# Altium PCB МПСУ-46342.21-004 Т5М.PcbDoc
Units mm, origin at the board's own origin, x right, y up, seen from the top; angles counter-clockwise.
Board outline 150 x 101.97 mm, 4 copper layers (Top Layer, RFGND, PWRandSignal, Bottom Layer), stack 1.292 mm thick; 65 components, 33 nets, 298 pads, 75 vias.
Unrouted connection lines stored in the file: 142.
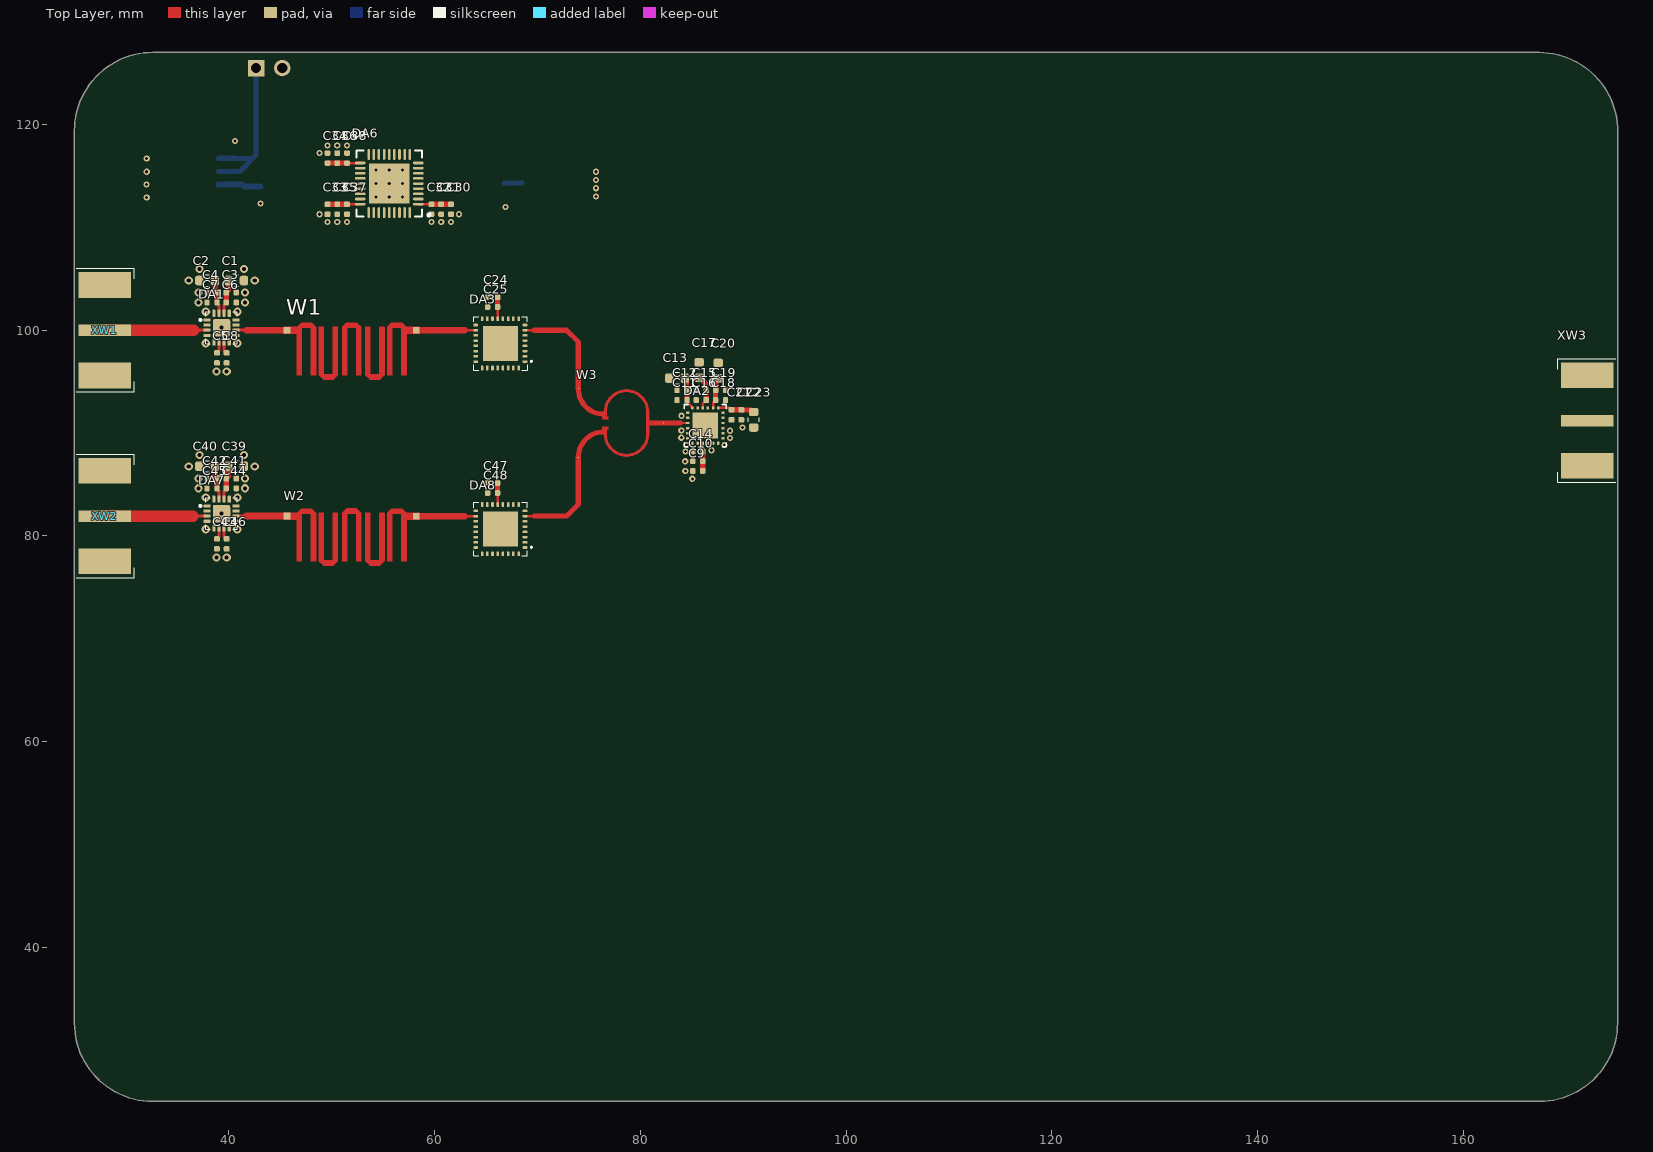
[diagram p0: Top Layer view]
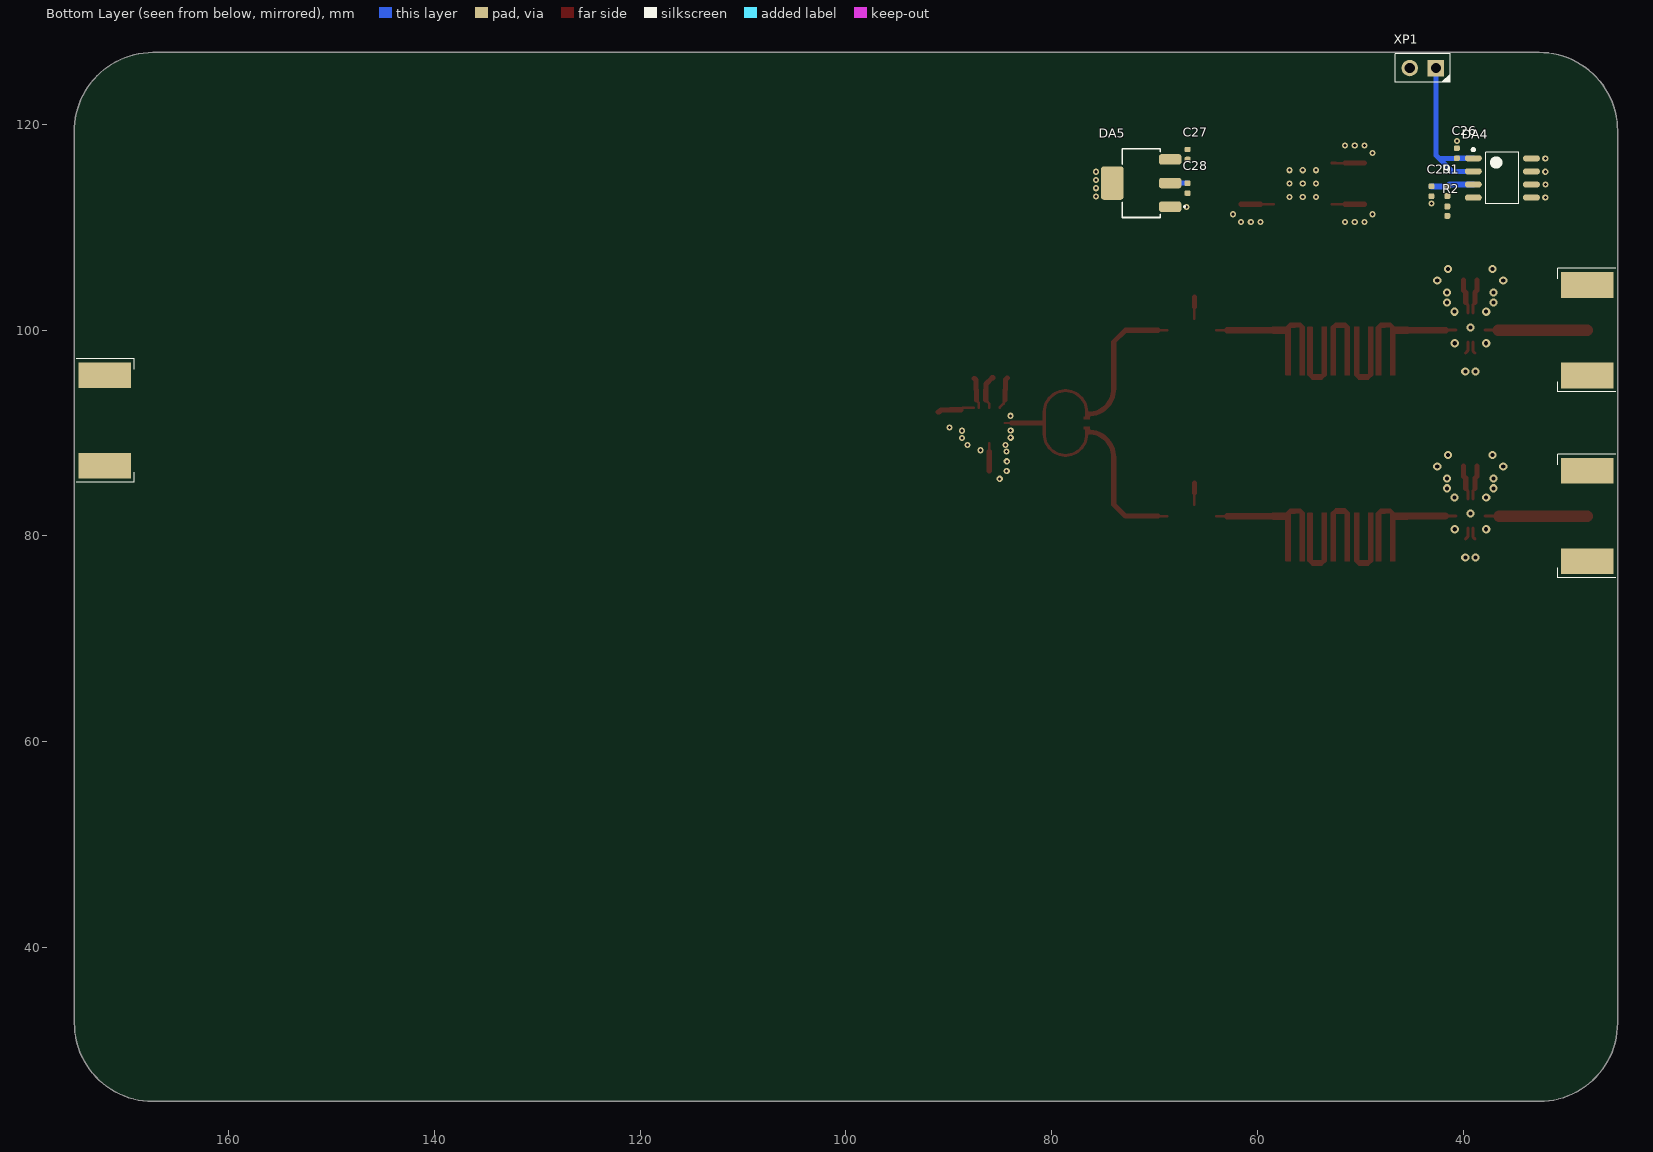
[diagram p1: Bottom Layer view, seen from below]

## Layer stack, top to bottom
Top Solder: solder mask 0.0102, Solder Resist, Dk 3.5
Top Layer: signal copper 0.018
RO4003C_12: core 0.508, RO4003C, Dk 3.55
RFGND: signal copper 0.018
RO4450F_23: prepreg 0.102, RO4450F, Dk 3.52
RO4450F_23_1: prepreg 0.102, RO4450F, Dk 3.52
PWRandSignal: signal copper 0.018
FR4_34: core 0.508, PP-006, Dk 4.6
Bottom Layer: signal copper 0.018
Bottom Solder: solder mask 0.0102, Solder Resist, Dk 3.5

## Board outline
25,32.663 25,119.37 24.998,119.368 cw(c32.63,119.368) 32.63,127 167.361,127 167.368,126.994 cw(c167.368,119.361) 174.999,119.234 174.999,32.663 cw(c167.367,32.663) 167.367,25.031 32.632,25.031 cw(c32.632,32.663)

## Design rules (kind name [scope] priority, off if disabled: settings)
AssemblyTestPointUsage [All] p1 off:
AssemblyTestpoint [All] p1 off: testpointundercomponent=TRUE minsize=1.016 maxsize=2.54 preferedsize=1.524 minholesize=0 maxholesize=1.016 preferedholesize=0.813 testpointgrid=0.025 usegrid=TRUE gridtolerance=0 allowsidetop=TRUE allowsidebottom=TRUE
BoardOutlineClearance [All] p1: gap=0.25 ignorepadtopadclearanceinfootprint=FALSE
Clearance [All] p1: gap=0.15 ignorepadtopadclearanceinfootprint=FALSE
ComponentClearance [All] p1: gap=0.2 collisioncheckmode=3 verticalgap=2540 showdistances=FALSE
FabricationTestPointUsage [All] p1 off: valid=0 allowmultiple=FALSE
FabricationTestpoint [All] p1 off: side=3 testpointundercomponent=TRUE minsize=1.016 maxsize=2.54 preferedsize=1.524 minholesize=0 maxholesize=1.016 preferedholesize=0.813 testpointgrid=0.025 allowsidetop=TRUE allowsidebottom=TRUE usegrid=TRUE gridtolerance=0
HoleSize [All] p1: absolutevalues=TRUE maxlimit=3.2 minlimit=0.4 maxpercent=80.000 minpercent=20.000
HoleToHoleClearance [All] p1: gap=0.3 allowstackedmicrovias=TRUE
MinimumSolderMaskSliver [All] p1: minsoldermaskwidth=0.12
PolygonConnect PolygonConnectMH [IsPad and IsFree and (Name Like 'MH*?')] p1: connectstyle=NoConnect reliefconductorwidth=0.254 reliefentries=4 polygonreliefangle="90 Angle" airgapwidth=0.4
PolygonConnect PolygonConnectGNDVia [IsVia vs InNet('GND')] p2: connectstyle=Direct reliefconductorwidth=0.254 reliefentries=4 polygonreliefangle="90 Angle" airgapwidth=0.254
PolygonConnect PolygonConnectGNDDirect [InComponentClass('GNDDirect') vs InNet('GND')] p3: connectstyle=Direct reliefconductorwidth=0.254 reliefentries=4 polygonreliefangle="90 Angle" airgapwidth=0.254
PolygonConnect [All] p4: connectstyle=Relief reliefconductorwidth=0.2 reliefentries=4 polygonreliefangle="90 Angle" airgapwidth=0.2
RoutingLayers RoutingLayersRF [InNetClass('RF')] p1: top layer_v5=TRUE mid layer 1_v5=FALSE mid layer 2_v5=FALSE bottom layer_v5=FALSE
RoutingLayers [All] p2: top layer_v5=TRUE mid layer 1_v5=TRUE mid layer 2_v5=TRUE bottom layer_v5=TRUE
RoutingVias [All] p1: holewidth=0.4 width=0.8 viastyle="Through Hole" minholewidth=0.4 minwidth=0.8 maxholewidth=3.2 maxwidth=4
SilkToSilkClearance [All] p1: silktosilkclearance=0.15
SilkToSolderMaskClearance [IsPad] p1: minsilkscreentomaskgap=0.15 clearancetoexposedcopper=TRUE
SolderMaskExpansion SolderMaskExpansionGNDVia [IsVia and InNet('GND')] p1: expansion=0.102 istentingtop=FALSE
SolderMaskExpansion [All] p2: expansion=0.075 istentingtop=FALSE
Width WidthRF [InNetClass('RF')] p1: maxlimit=1.1 minlimit=0.2 preferedwidth=0.254 toplayer_prefwidth=1.1 impedanceprofiledriven=TRUE impedanceprofileid={393F9141-3DCD-45E2-ACEF-11D70CD72339} impedanceprofilevalue=50.000000 minimp=50.000000 maximp=50.000000 favimp=50.000000
Width [All] p2: maxlimit=1.1 minlimit=0.15 preferedwidth=0.2
19 further rules are at their usual default settings.

## Classes and differential pairs
component class M4: C47 C48 DA8
component class M3: C39 C40 C41 C42 C43 C44 C45 C46 DA7
component class GNDDirect: XW1 XW2 XW3
net class RF: "LNA1 RF IN C1" "LNA1 RF IN C2" "LNA1 RF OUT C1" "LNA1 RF OUT C2" "LNA2 RF IN" "LNA2 RF OUT" "PS RF IN C1" "PS RF IN C2" "PS RF OUT C1" "PS RF OUT C2"
component class M7: C30 C31 C32 C33 C34 C35 C36 C37 C38 DA6
component class M6: C26 C27 C28 C29 DA4 DA5 R1 R2
component class M2: C24 C25 DA3
component class M5: C9 C10 C11 C12 C13 C14 C15 C16 C17 C18 C19 C20 C21 C22 C23 DA2
component class M1: C1 C2 C3 C4 C5 C6 C7 C8 DA1
component class "МПСУ-46342.21-004 Э3 Лист1": W1 W2 W3 XP1 XW1 XW2 XW3
component class RFCons: DA1 DA2 DA7

## Components (designator, comment, footprint, x,y, rotation, side; value= is the part's Value field where it differs from the comment)
C1 "4.7 uF" CAPC160X80X90L30N 40.725,104.825 r180 top
C2 "4.7 uF" CAPC160X80X90L30N 37.9,104.825 r0 top
C3 "10 pF" CAPC100X50X55L20N 40.25,103.65 r180 top value="0.01 nF"
C4 "10 pF" CAPC100X50X55L20N 38.375,103.65 r0 top value="0.01 nF"
C5 "100 pF" CAPC100X50X55L20N 38.85,97.3 r90 top
C6 "100 pF" CAPC100X50X55L20N 40.25,102.7 r180 top
C7 "100 pF" CAPC100X50X55L20N 38.375,102.7 r0 top
C8 "100 pF" CAPC100X50X55L20N 39.8,97.3 r90 top
C9 "2.2 uF" CAPC100X50X55L20N 85.59,86.318 r0 top
C10 "1000 pF" CAPC100X50X55L20N 85.59,87.267 r0 top
C11 "100 pF" CAPC100X50X55L20N 84.059,93.196 r0 top
C12 "1000 pF" CAPC100X50X55L20N 84.058,94.162 r0 top
C13 "2.2 uF" CAPC160X80X90L30N 83.575,95.341 r0 top
C14 "100 pF" CAPC100X50X55L20N 85.585,88.212 r0 top
C15 "100 pF" CAPC100X50X55L20N 85.926,94.169 r0 top
C16 "1000 pF" CAPC100X50X55L20N 85.925,93.201 r0 top
C17 "2.2 uF" CAPC160X80X90L30N 85.725,96.125 r270 top
C18 "100 pF" CAPC100X50X55L20N 87.802,93.199 r180 top
C19 "1000 pF" CAPC100X50X55L20N 87.811,94.172 r180 top
C20 "2.2 uF" CAPC160X80X90L30N 87.571,96.073 r270 top
C21 "100 pF" CAPC100X50X55L20N 88.87,91.774 r90 top
C22 "1000 pF" CAPC100X50X55L20N 89.822,91.77 r90 top
C23 "2.2 uF" CAPC160X80X90L30N 91.027,91.29 r90 top
C24 "1000 pF" CAPC100X50X55L20N 65.65,103.2 r0 top
C25 "100 pF" CAPC100X50X55L20N 65.65,102.25 r0 top
C26 "10 uF" CAPC100X50X55L20N 40.625,117.199 r270 bottom
C27 "10 uF" CAPC100X50X55L20N 66.8,117.075 r270 bottom
C28 "10 uF" CAPC100X50X55L20N 66.8,113.8 r90 bottom
C29 "10 uF" CAPC100X50X55L20N 43.1,113.5 r90 bottom
C30 "4.7 uF" CAPC100X50X55L20N 61.6,111.75 r90 top
C31 "10 pF" CAPC100X50X55L20N 60.65,111.75 r90 top
C32 "100 pF" CAPC100X50X55L20N 59.7,111.75 r90 top
C33 "4.7 uF" CAPC100X50X55L20N 49.6,111.75 r90 top
C34 "4.7 uF" CAPC100X50X55L20N 49.6,116.725 r270 top
C35 "10 pF" CAPC100X50X55L20N 50.55,111.75 r90 top
C36 "10 pF" CAPC100X50X55L20N 50.55,116.725 r270 top
C37 "100 pF" CAPC100X50X55L20N 51.5,111.75 r90 top
C38 "100 pF" CAPC100X50X55L20N 51.5,116.725 r270 top
C39 "4.7 uF" CAPC160X80X90L30N 40.725,86.775 r180 top
C40 "4.7 uF" CAPC160X80X90L30N 37.9,86.775 r0 top
C41 "10 pF" CAPC100X50X55L20N 40.25,85.575 r180 top value="0.01 nF"
C42 "10 pF" CAPC100X50X55L20N 38.375,85.575 r0 top value="0.01 nF"
C43 "100 pF" CAPC100X50X55L20N 38.85,79.225 r90 top
C44 "100 pF" CAPC100X50X55L20N 40.25,84.625 r180 top
C45 "100 pF" CAPC100X50X55L20N 38.375,84.625 r0 top
C46 "100 pF" CAPC100X50X55L20N 39.8,79.225 r90 top
C47 "1000 pF" CAPC100X50X55L20N 65.65,85.14 r0 top
C48 "100 pF" CAPC100X50X55L20N 65.65,84.174 r0 top
DA1 "HMC902LP3" QFN17P50_300X300X90L40X25T170N 39.3,100.25 r270 top
DA2 "HMC633LC4" PQFN25P50_390X390X100L32X30T250N 86.325,90.725 r270 top
DA3 "TGP2105-SM" QFN33P50_500X500X80L46X25T340N 66.4,98.725 r90 top
DA4 "MIC39102" SOIC127P600X160-8N 36.2,114.794 r180 bottom
DA5 "NCP1117LPST50T3G" SOT223-4P230_700X180L92X74N 71.3,114.3 r90 bottom
DA6 "" QFN50P600X600X90_HS-37N 55.6,114.25 r180 top
DA7 "HMC902LP3" QFN17P50_300X300X90L40X25T170N 39.3,82.175 r270 top
DA8 "TGP2105-SM" QFN33P50_500X500X80L46X25T340N 66.4,80.65 r90 top
R1 "330 k" RESC100X50X40L25N 41.55,113.5 r90 bottom
R2 "1 M" RESC100X50X40L25N 41.553,111.569 r90 bottom
W1 "Filter" Filter 52,97.94 r0 top
W2 "Filter" Filter 52,79.865 r0 top net-tie
W3 "Wilkinson Coupler" CouplerWilk 82.253,90.975 r180 top net-tie
XP1 "PLD-2 2x1" HDRV2W64P254_1X2_254X508H884 42.66,125.475 r90 bottom
XW1 "MOLEX 73251-1153" "MOLEX 73251-1153 - 1.1pin" 25,100 r0 top
XW2 "MOLEX 73251-1153" "MOLEX 73251-1153 - 1.1pin" 25,81.925 r0 top
XW3 "MOLEX 73251-1153" "MOLEX 73251-1153 - 1.1pin" 175,91.208 r180 top

## Footprints (in the part's own frame and the unit in brackets; to place one, negate y for a bottom-side part, rotate by r counter-clockwise, add the part's x,y. Pads: shape width x height; smd on the part's side, far side on the other; paste and mask are expansions set on the pad)
CAPC100X50X55L20N [mm] "Capacitor, Chip; 1.00 mm L X 0.50 mm W X 0.55 mm H body"
  rrect49% 0.53x0.58 smd: 1(-0.485,0) 2(0.485,0)
  body extent -0.5,-0.25 0.5,0.25, height 0.55
CAPC160X80X90L30N [mm] "Capacitor, Chip; 1.60 mm L X 0.80 mm W X 0.90 mm H body"
  rrect51% 0.82x0.93 smd: 1(-0.755,0) 2(0.755,0)
  silkscreen extent -0.2,-0.55 0.2,0.55, body extent -0.8,-0.4 0.8,0.4, height 0.9
CouplerWilk [mm] "Wilkinson Coupler diel 7.2GHz, RO4003, h=0.2mm"
  round 0.1 smd paste-0.1 mask-0.1: 1(0,0) 2(8.278,3.35) 3(8.278,-3.35)
  Top Layer region: 8.053,3.35 8.053,3.425 8.503,3.425 8.503,3.35
  Top Layer region: 8.053,-3.425 8.053,-3.35 8.503,-3.35 8.503,-3.425
  Top Layer region: 1.401,-1.074 1.401,-0.226 -0.1,-0.226 -0.1,0.226 1.401,0.226 1.401,1.074 1.618,2.024 2.226,2.786 3.103,3.209 4.078,3.209 4.956,2.786 5.563,2.024 5.78,1.074 5.78,1.074 6.917,1.38 7.749,2.213 8.053,3.35 8.053,3.35 8.503,3.35 8.296,2.308 7.705,1.425 6.822,0.835 5.78,0.627 5.78,0.627 5.78,0.625 5.966,0.625 5.966,0.376 5.341,0.376 5.341,0.625 5.529,0.625 5.529,1.074 5.336,1.916 4.798,2.592 4.02,2.966 3.156,2.966 2.378,2.592 1.84,1.916 1.648,1.074 1.648,1.074 1.65,1.074 1.65,-1.074 1.842,-1.916 2.381,-2.592 3.159,-2.966 4.022,-2.966 4.801,-2.592 5.339,-1.916 5.531,-1.074 5.531,-1.074 5.529,-1.074 5.529,-0.625 5.341,-0.625 5.341,-0.376 5.966,-0.376 5.966,-0.625 5.78,-0.625 7.142,-0.991 8.138,-1.988 8.503,-3.35 8.503,-3.35 8.053,-3.35 7.88,-2.48 7.388,-1.743 6.65,-1.25 5.78,-1.077 5.78,-1.077 5.78,-1.074 5.563,-2.024 4.956,-2.786 4.078,-3.209 3.103,-3.209 2.226,-2.786 1.618,-2.024 1.401,-1.074
Filter [mm] "Bandpass filter, Fc 8.9 GHz, BW 150 MHz"
  rect 0.657x0.657 smd paste-0.6 mask-0.6: 1(-6.334,2.059) 2(6.23,2.055)
  Top Layer region: 3.459,-2.343 3.86,-2.343 3.879,-2.339 3.896,-2.328 3.906,-2.312 3.91,-2.293 3.91,-2.293 3.91,2.283 4.336,2.283 4.34,2.283 4.344,2.282 4.344,2.282 4.775,2.282 4.775,-2.284 4.779,-2.304 4.79,-2.32 4.806,-2.331 4.826,-2.335 4.826,-2.335 5.231,-2.335 5.25,-2.331 5.266,-2.32 5.277,-2.304 5.281,-2.284 5.281,-2.284 5.281,1.727 6.508,1.727 6.527,1.73 6.544,1.741 6.554,1.758 6.558,1.777 6.558,1.777 6.558,2.333 6.554,2.352 6.544,2.368 6.527,2.379 6.508,2.383 6.508,2.383 5.251,2.383 4.862,2.773 4.845,2.784 4.826,2.788 4.826,2.788 4.344,2.788 4.34,2.788 4.336,2.787 4.336,2.787 3.86,2.787 3.836,2.782 3.818,2.765 3.818,2.765 3.424,2.371 3.412,2.354 3.408,2.335 3.408,2.335 3.408,-2.293 3.412,-2.312 3.423,-2.328 3.44,-2.339 3.459,-2.343
  Top Layer region: 1.292,-2.327 1.695,-2.731 1.712,-2.742 1.731,-2.746 1.731,-2.746 2.697,-2.746 2.721,-2.74 2.739,-2.724 2.739,-2.724 3.134,-2.328 3.145,-2.312 3.149,-2.293 3.149,-2.293 3.149,2.335 3.145,2.354 3.134,2.37 3.118,2.381 3.099,2.385 3.099,2.385 2.697,2.385 2.678,2.381 2.662,2.37 2.651,2.354 2.647,2.335 2.647,2.335 2.647,-2.241 1.781,-2.241 1.781,2.348 1.777,2.367 1.766,2.383 1.75,2.394 1.73,2.398 1.73,2.398 1.329,2.398 1.309,2.394 1.293,2.383 1.282,2.367 1.278,2.348 1.278,2.348 1.278,-2.282 1.28,-2.307 1.292,-2.328
  Top Layer region: -0.987,-2.291 -0.983,-2.31 -0.972,-2.326 -0.956,-2.337 -0.937,-2.341 -0.937,-2.341 -0.535,-2.341 -0.516,-2.337 -0.499,-2.326 -0.489,-2.31 -0.485,-2.291 -0.485,-2.291 -0.485,2.297 0.382,2.297 0.382,-2.292 0.385,-2.311 0.396,-2.327 0.413,-2.338 0.432,-2.342 0.432,-2.342 0.834,-2.342 0.853,-2.338 0.869,-2.327 0.88,-2.311 0.884,-2.292 0.884,-2.292 0.884,2.338 0.885,2.343 0.885,2.348 0.885,2.348 0.881,2.367 0.87,2.383 0.87,2.383 0.467,2.787 0.45,2.798 0.431,2.802 0.431,2.802 -0.535,2.802 -0.558,2.796 -0.576,2.781 -0.576,2.781 -0.972,2.384 -0.983,2.368 -0.987,2.348 -0.987,2.348
  Top Layer region: -2.835,-2.729 -3.239,-2.325 -3.252,-2.304 -3.252,-2.279 -3.252,-2.279 -3.252,2.338 -3.248,2.357 -3.237,2.373 -3.221,2.384 -3.202,2.388 -3.202,2.388 -2.801,2.388 -2.782,2.384 -2.765,2.373 -2.754,2.357 -2.75,2.338 -2.75,2.338 -2.75,-2.239 -1.884,-2.239 -1.884,2.349 -1.88,2.368 -1.869,2.384 -1.853,2.395 -1.833,2.399 -1.833,2.399 -1.432,2.399 -1.412,2.395 -1.396,2.384 -1.385,2.368 -1.381,2.349 -1.381,2.349 -1.381,-2.291 -1.385,-2.31 -1.396,-2.327 -1.396,-2.327 -1.792,-2.723 -1.81,-2.738 -1.833,-2.744 -1.833,-2.744 -2.8,-2.744 -2.819,-2.74 -2.835,-2.729
  Top Layer region: -6.612,1.731 -5.385,1.731 -5.385,-2.28 -5.381,-2.299 -5.37,-2.316 -5.354,-2.326 -5.335,-2.33 -5.335,-2.33 -4.93,-2.33 -4.91,-2.326 -4.894,-2.316 -4.883,-2.299 -4.879,-2.28 -4.879,-2.28 -4.879,2.287 -4.448,2.287 -4.444,2.287 -4.44,2.287 -4.44,2.287 -4.014,2.287 -4.014,-2.29 -4.01,-2.309 -3.999,-2.325 -3.983,-2.336 -3.963,-2.34 -3.963,-2.34 -3.562,-2.34 -3.543,-2.336 -3.527,-2.325 -3.516,-2.309 -3.512,-2.29 -3.512,-2.29 -3.512,2.327 -3.511,2.332 -3.511,2.338 -3.511,2.338 -3.514,2.357 -3.526,2.374 -3.526,2.374 -3.929,2.777 -3.945,2.788 -3.965,2.792 -3.965,2.792 -3.965,2.792 -3.965,2.792 -3.965,2.792 -4.44,2.792 -4.444,2.792 -4.448,2.792 -4.448,2.792 -4.929,2.792 -4.949,2.789 -4.966,2.777 -4.966,2.777 -5.355,2.388 -6.612,2.388 -6.631,2.384 -6.648,2.373 -6.658,2.356 -6.662,2.337 -6.662,2.337 -6.662,1.781 -6.658,1.762 -6.648,1.746 -6.631,1.735 -6.612,1.731
HDRV2W64P254_1X2_254X508H884 [mm] "Header, Vertical, 2.54 mm pitch; 0.64 mm lead width, 2 pins, 2 rows, 1 pin per row, 2.54 mm L X 5.08 mm W X 8.84 mm H body"
  rect 1.6x1.6 hole 1 paste-1.6: 1(0,0)
  round 1.6 hole 1 paste-1.6: 2(0,2.54)
  silkscreen extent -1.4,-1.4 1.4,3.95, body extent -1.27,-1.27 1.27,3.81, height 8.84
"MOLEX 73251-1153 - 1.1pin" [mm] "MOLEX 50 Ohms, SMA Jack Receptacle, Edge Mount, .25µm Gold (Au) Plating"
  rect 5.1x1.1 smd: 1(2.95,0)
  rect 5.1x2.5 smd: 2(2.95,-4.4) 2(2.95,4.4)
  rect 5.1x2.5 smd far side: 2(2.95,-4.4) 2(2.95,4.4)
  silkscreen extent 0.2,-6 5.8,6, body extent -9.5,-4.76 4.77,4.76, height 4.36
PQFN25P50_390X390X100L32X30T250N [mm] "Pullback Quad Flat No-Lead (PQFN with Tab), 0.50 mm pitch; square, 6 pin X 6 pin, 3.90 mm L X 3.90 mm W X 1.00 mm H body"
  rrect51% 0.24x0.32 smd: 1(-1.25,-1.715) 2(-0.75,-1.715) 3(-0.25,-1.715) 4(0.25,-1.715) 5(0.75,-1.715) 6(1.25,-1.715) 13(1.25,1.715) 14(0.75,1.715) 15(0.25,1.715) 16(-0.25,1.715) 17(-0.75,1.715) 18(-1.25,1.715)
  rrect51% 0.32x0.24 smd: 7(1.715,-1.25) 8(1.715,-0.75) 9(1.715,-0.25) 10(1.715,0.25) 11(1.715,0.75) 12(1.715,1.25) 19(-1.715,1.25) 20(-1.715,0.75) 21(-1.715,0.25) 22(-1.715,-0.25) 23(-1.715,-0.75) 24(-1.715,-1.25)
  rect 2.5x2.5 smd: 25(0,0)
  silkscreen extent -2.05,-2.05 2.05,2.05, body extent -1.95,-1.95 1.95,1.95, height 1
QFN17P50_300X300X90L40X25T170N [mm] "Quad Flat No-Lead (QFN with Tab), 0.50 mm pitch; square, 4 pin X 4 pin, 3.00 mm L X 3.00 mm W X 0.90 mm H body"
  rrect51% 0.3x0.71 smd: 1(-0.75,-1.405) 2(-0.25,-1.405) 3(0.25,-1.405) 4(0.75,-1.405) 9(0.75,1.405) 10(0.25,1.405) 11(-0.25,1.405) 12(-0.75,1.405)
  rrect51% 0.71x0.3 smd: 5(1.405,-0.75) 6(1.405,-0.25) 7(1.405,0.25) 8(1.405,0.75) 13(-1.405,0.75) 14(-1.405,0.25) 15(-1.405,-0.25) 16(-1.405,-0.75)
  rrect24% 1.7x1.7 smd paste-1.7: 17(0,0)
  silkscreen extent -1.55,-2.16 1.55,1.55, body extent -1.55,-1.55 1.55,1.55, height 0.9
QFN33P50_500X500X80L46X25T340N [mm] "Quad Flat No-Lead (QFN with Tab), 0.50 mm pitch; square, 8 pin X 8 pin, 5.00 mm L X 5.00 mm W X 0.80 mm H body"
  rrect54% 0.25x0.46 smd: 1(-1.778,-2.395) 2(-1.27,-2.395) 3(-0.762,-2.395) 4(-0.254,-2.395) 5(0.254,-2.395) 6(0.762,-2.395) 7(1.27,-2.395) 8(1.778,-2.395) 17(1.778,2.395) 18(1.27,2.395) 19(0.762,2.395) 20(0.254,2.395) 21(-0.254,2.395) 22(-0.762,2.395) 23(-1.27,2.395) 24(-1.778,2.395)
  rrect54% 0.46x0.25 smd: 9(2.395,-1.778) 10(2.395,-1.27) 11(2.395,-0.762) 12(2.395,-0.254) 13(2.395,0.254) 14(2.395,0.762) 15(2.395,1.27) 16(2.395,1.778) 25(-2.395,1.778) 26(-2.395,1.27) 27(-2.395,0.762) 28(-2.395,0.254) 29(-2.395,-0.254) 30(-2.395,-0.762) 31(-2.395,-1.27) 32(-2.395,-1.778)
  rect 3.4x3.4 smd: 33(0,0)
  silkscreen extent -2.6,-3.09 2.6,2.6, body extent -2.55,-2.55 2.55,2.55, height 0.8
QFN50P600X600X90_HS-37N [mm] "QFN, 36-Leads, Body 6,00x6,00mm, Pitch 0,50mm, Thermal Pad 3,90x3,90mm, IPC Medium Density"
  oval 1.05x0.25 smd: 1(-2.825,2) 2(-2.825,1.5) 3(-2.825,1) 4(-2.825,0.5) 5(-2.825,0) 6(-2.825,-0.5) 7(-2.825,-1) 8(-2.825,-1.5) 9(-2.825,-2) 19(2.825,-2) 20(2.825,-1.5) 21(2.825,-1) 22(2.825,-0.5) 23(2.825,0) 24(2.825,0.5) 25(2.825,1) 26(2.825,1.5) 27(2.825,2)
  oval 0.25x1.05 smd: 10(-2,-2.825) 11(-1.5,-2.825) 12(-1,-2.825) 13(-0.5,-2.825) 14(0,-2.825) 15(0.5,-2.825) 16(1,-2.825) 17(1.5,-2.825) 18(2,-2.825) 28(2,2.825) 29(1.5,2.825) 30(1,2.825) 31(0.5,2.825) 32(0,2.825) 33(-0.5,2.825) 34(-1,2.825) 35(-1.5,2.825) 36(-2,2.825)
  rect 3.9x3.9 smd: 37(0,0)
  silkscreen extent -3.98,-3.2 3.2,3.2, body extent -3.05,-3.05 3.05,3.05, height 0.9
RESC100X50X40L25N [mm] "Resistor, Chip; 1.00 mm L X 0.50 mm W X 0.40 mm H body"
  rrect52% 0.58x0.58 smd: 1(-0.46,0) 2(0.46,0)
  body extent -0.5,-0.25 0.5,0.25, height 0.4
SOIC127P600X160-8N [mm] "SOIC, 8-Leads, Body 4.90x3.90mm, Pitch 1.27mm, IPC Medium Density"
  oval 1.65x0.6 smd: 1(-2.825,1.905) 2(-2.825,0.635) 3(-2.825,-0.635) 4(-2.825,-1.905) 5(2.825,-1.905) 6(2.825,-0.635) 7(2.825,0.635) 8(2.825,1.905)
  silkscreen extent -2.95,-2.5 1.6,2.88, body extent -3,-2.5 3,2.5, height 1.6
SOT223-4P230_700X180L92X74N [mm] "Small Outline Transistor (SOT223), 2.30 mm pitch; 4 pin, 6.50 mm L X 3.50 mm W X 1.80 mm H body"
  rrect49% 1.02x2.18 smd: 1(-2.3,-2.815) 2(0,-2.815) 3(2.3,-2.815)
  rrect23% 3.25x2.18 smd: 4(0,2.815)
  silkscreen extent -3.35,-4.28 3.35,1.85, body extent -3.25,-3.5 3.25,3.5, height 1.8

## Part data
C1 C13 C17 C20 C23 C39: library part Capacitor, "Capacitor, generic", Package=0603, Tolerance="5 %", VDC="20 V"
C2 C3 C4 C5 C6 C7 C8 C9 C10 C11 C12 C14 C15 C16 C18 C19 C21 C22 C24 C25 C26 C27 C28 C29 C30 C31 C32 C33 C34 C35 C36 C37 C38 C40 C41 C42 C43 C44 C45 C46 C47 C48: library part Capacitor, "Capacitor, generic", Package=0402, Tolerance="5 %", VDC="20 V"
DA1 DA7: "GaAs, pHEMT, MMIC, Low Noise Amplifier, 5 GHz to 11 GHz", Manufacturer="Analog Devices", ClassName=RFCons, ComponentLink1Description="Component page", ComponentLink1URL=https://www.analog.com/en/products/hmc902lp3e.html, PartNumber=HMC902LP3
DA2: "GaAs, pHEMT MMIC DRIVERAMPLIFIER, 5.5 - 17 GHz", Manufacturer="Analog Devices", ClassName=RFCons, ComponentLink1Description="Component page", ComponentLink1URL=https://www.analog.com/en/products/hmc633lc4.html, PartNumber=HMC633LC4
DA3 DA8: library part "TGP2105-SM 1", "6 - 18 GHz 6-Bit Digital Phase Shifter (+Vc)", Manufacturer=Qorvo, ComponentLink1Description="Component Page", ComponentLink1URL=https://www.qorvo.com/products/p/TGP2105-SM, PartNumber=TGP2105-SM
DA4: "1A Low-Voltage Low-Dropout Regulator, Adj", Manufacturer=Microchip, PartNumber=MIC39102
DA5: library part NCP1117LP, "1.0 A Low-Dropout Positive / Fixed and Adjustable / Voltage Regulators", Manufacturer="On Semiconductor", PartNumber=NCP1117LPST50T3G
DA6: library part GD32VF103Tx
R1: library part Resistor, "Resistor, generic", Package=0402
R2: library part Resistor, "Resistor, generic", Package=0402, Power="20 V", Tolerance="5 %"
W3: library part CouplerWilk, "Wilkinson Coupler diel 7.2GHz, RO4003, h=0.2mm"
XP1: library part PLD-2, "Header, Vertical, Non-shrouded, 2.54 mm pitch 2x1", Net1="+12 V", Net2=GND, PartNumber="PLD-2 2x1"
XW1 XW2 XW3: "MOLEX 73251-1153 (SMA EDGE)", Manufacturer=Molex, ClassName=GNDDirect, PartNumber="MOLEX 73251-1153"

## Via types
v1: diameter 0.6, hole 0.3, Top Layer to Bottom Layer, tented both sides, 45 vias
v2: diameter 0.8, hole 0.4, Top Layer to Bottom Layer, tented both sides, 30 vias

## Nets (pads, with @x,y where several pads share a name; then routed paths per layer and width w, separated by ;. In a path a pad name is that pad's centre, name@x,y a point inside that pad or via, vN(x,y) a via of type N, cw(c..) or ccw(c..) an arc to the next point about the centre after c; other vN are vias at no path point)
"12 V": C26.2 C27.2 DA4.1 DA4.2 DA5.3 XP1.1 | length 16.1
  Bottom Layer w0.5: DA4.2 41.097,115.429 42.367,116.699 ; DA4.1 39.032,116.707 40.617,116.707 C26.2 40.64,116.699 42.367,116.699 ; XP1.1 42.66,116.992 42.367,116.699
+3.5V: C1.2 C2.2 C3.2 C4.2 C6.2 C7.2 C28.2 C30.2 C31.2 C32.2 C33.2 C34.2 C35.2 C36.2 C37.2 C38.2 C39.2 C40.2 C41.2 C42.2 C44.2 C45.2 DA1.14 DA1.15 DA5.2 DA6.1 DA6.19 DA6.27 DA7.14 DA7.15 | length 24.7
  Top Layer w0.25: C33.2 C33.2@49.615,112.25 ; C37.2 51.515,112.25 DA6.27 ; C38.2 52.365,116.24 52.375,116.25 DA6.19 ; DA6.1 59.685,112.25 C32.2
  Top Layer w0.3: C45.2 38.86,84.6 39.05,84.41 DA7.15 ; C7.2 38.86,102.675 39.05,102.485 DA1.15 ; DA7.14 39.55,84.385 39.765,84.6 C44.2 ; DA1.14 39.55,102.46 39.765,102.675 C6.2
  Top Layer w0.5: C40.2 38.655,85.805 38.86,85.6 C42.2 C45.2 ; C2.2@38.655,104.85 38.655,103.88 38.86,103.675 C4.2 C7.2 ; C44.2 39.765,85.6 39.97,85.805 C39.2 ; C6.2 39.765,103.675 39.97,103.88 C1.2@39.97,104.85 ; C33.2 C35.2 C37.2 ; C34.2 C36.2 C38.2 ; C32.2 C31.2 C30.2
  Bottom Layer w0.5: C28.2 66.807,114.293 68.477,114.293 DA5.2
+5V: C11.2 C12.2 C13.2 C15.2 C16.2 C17.2 C18.2 C19.2 C20.2 C21.2 C22.2 C23.2 C24.2 C25.2 C29.2 C47.2 C48.2 DA2.19 DA2.20 DA2.22 DA2.24 DA3.13 DA4.3 DA8.13 R1.2 | length 21.7
  Top Layer w0.25: C48.2 66.146,84.163 DA8.13 ; C25.2 66.146,102.239 DA3.13 ; C11.2 84.681,93.059 84.681,92.864 85.075,92.47 DA2.24 ; DA2.22 86.075,92.866 86.248,93.039 86.27,93.039 86.41,93.178 C16.2 ; DA2.20 87.08,92.445 87.08,92.934 87.317,93.172 C18.2 ; DA2.19 88.661,92.44 C21.2@88.842,92.259
  Top Layer w0.5: C48.2 C47.2 ; C25.2 C24.2 ; C13.2 84.49,95.181 84.49,94.239 84.543,94.187 C12.2 C11.2 ; C17.2 85.78,95.37 86.396,94.754 86.396,94.184 C15.2 C16.2 ; C18.2 87.322,93.204 87.322,94.168 C19.2 87.326,94.197 87.356,94.227 87.356,95.158 87.516,95.318 C20.2 ; C21.2@88.842,92.259 88.844,92.257 89.82,92.257 C22.2 89.837,92.24 90.777,92.24 90.972,92.045 C23.2
  Bottom Layer w0.58: DA4.3 41.351,114.159 R1.2 43.075,113.96 C29.2
"+5V 5deg PS1": DA3.28 DA6.8
"+5V 5deg PS2": DA6.14 DA8.28
"+5V 11deg PS1": DA3.30 DA6.9
"+5V 11deg PS2": DA6.20 DA8.30
"+5V 22deg PS1": DA3.10 DA6.13
"+5V 22deg PS2": DA6.21 DA8.10
"+5V 45deg PS1": DA3.11 DA6.10
"+5V 45deg PS2": DA6.22 DA8.11
"+5V 90deg PS1": DA3.15 DA6.11
"+5V 90deg PS2": DA6.23 DA8.15
"+5V 180deg PS1": DA3.12 DA6.12
"+5V 180deg PS2": DA6.24 DA8.12
GND: C1.1 C2.1 C3.1 C4.1 C5.1 C6.1 C7.1 C8.1 C9.1 C10.1 C11.1 C12.1 C13.1 C14.1 C15.1 C16.1 C17.1 C18.1 C19.1 C20.1 C21.1 C22.1 C23.1 C24.1 C25.1 C26.1 C27.1 C28.1 C29.1 C30.1 C31.1 C32.1 C33.1 C34.1 C35.1 C36.1 C37.1 C38.1 C39.1 C40.1 C41.1 C42.1 C43.1 C44.1 C45.1 C46.1 C47.1 C48.1 DA1.1 DA1.2 DA1.4 DA1.5 DA1.8 DA1.9 DA1.11 DA1.12 DA1.13 DA1.16 DA1.17 DA2.1 DA2.2 DA2.4 DA2.5 DA2.6 DA2.7 DA2.8 DA2.10 DA2.11 DA2.12 DA2.13 DA2.14 DA2.15 DA2.17 DA2.18 DA2.25 DA3.1 DA3.2 DA3.3 DA3.4 DA3.5 DA3.6 DA3.8 DA3.9 DA3.14 DA3.16 DA3.17 DA3.19 DA3.20 DA3.21 DA3.22 DA3.23 DA3.24 DA3.25 DA3.26 DA3.27 DA3.29 DA3.31 DA3.32 DA3.33 DA4.5 DA4.6 DA4.7 DA4.8 DA5.1 DA5.4 DA7.1 DA7.2 DA7.4 DA7.5 DA7.8 DA7.9 DA7.11 DA7.12 DA7.13 DA7.16 DA7.17 DA8.1 DA8.2 DA8.3 DA8.4 DA8.5 DA8.6 DA8.8 DA8.9 DA8.14 DA8.16 DA8.17 DA8.19 DA8.20 DA8.21 DA8.22 DA8.23 DA8.24 DA8.25 DA8.26 DA8.27 DA8.29 DA8.31 DA8.32 DA8.33 R2.1 XP1.2 XW1.2 XW2.2 XW3.2
  other v1: 59.7,110.515 60.65,110.515 61.6,110.515 62.375,111.265 32,114.15
  other v2: 39.3,82.175 39.3,100.25
"LNA1 RF IN C1": DA1.3 XW1.1 | length 9.9
  Top Layer w0.3: 36.6,100 DA1.3
  Top Layer w1.1: XW1.1 36.6,100
"LNA1 RF IN C2": DA7.3 XW2.1 | length 9.9
  Top Layer w0.3: 36.525,81.925 DA7.3
  Top Layer w1.1: XW2.1 36.525,81.925
"LNA1 RF OUT C1": DA1.10 W1.1 | length 5
  Top Layer w0.3: DA1.10@40.7,100 DA1.10 41.725,100
  Top Layer w0.657: 41.726,99.999 W1.1
"LNA1 RF OUT C2": DA7.10 W2.1 | length 5
  Top Layer w0.3: DA7.10@40.71,81.925 41.73,81.925
  Top Layer w0.657: 41.731,81.924 W2.1@45.671,81.924
"LNA2 RF IN": DA2.3 W3.1 | length 2.4
  Top Layer w0.2: 83.9,90.975 DA2.3
  Top Layer w0.5: W3.1 83.9,90.975
"LNA2 RF OUT": DA2.16 XW3.1
NetC5_2: C5.2 DA1.6 | length 1.2
  Top Layer w0.3: C5.2 38.875,97.785 39.05,97.96 DA1.6
NetC8_2: C8.2 DA1.7 | length 1.2
  Top Layer w0.3: DA1.7 39.55,98.01 39.775,97.785 C8.2
NetC9_2: C9.2 C10.2 C14.2 DA2.9 | length 2.7
  Top Layer w0.2: C14.2 86.072,88.215 86.072,89.007 DA2.9 ; DA2.9@86.075,88.963 DA2.9@86.08,88.968
  Top Layer w0.5: C14.2 86.072,88.209 86.072,86.321 C9.2
NetC43_2: C43.2 DA7.6 | length 1.2
  Top Layer w0.3: C43.2 38.875,79.71 39.05,79.885 DA7.6
NetC46_2: C46.2 DA7.7 | length 1.2
  Top Layer w0.3: DA7.7 39.55,79.935 39.775,79.71 C46.2
NetDA4_4: DA4.4 R1.1 R2.2
"PS RF IN C1": DA3.18 W1.2 | length 5.8
  Top Layer w0.25: 62.93,99.995 DA3.18
  Top Layer w0.657: W1.2 62.93,99.995
"PS RF IN C2": DA8.18 W2.2 | length 5.8
  Top Layer w0.25: 62.93,81.92 DA8.18
  Top Layer w0.657: W2.2 62.93,81.92
"PS RF OUT C1": DA3.7 W3.3 | length 10.2
  Top Layer w0.25: DA3.7 69.695,99.995
  Top Layer w0.5: 69.695,99.995 72.845,99.995 73.975,98.865 W3.3@73.975,94.344
"PS RF OUT C2": DA8.7 W3.2 | length 10.2
  Top Layer w0.25: DA8.7 69.695,81.92
  Top Layer w0.5: 69.695,81.92 72.845,81.92 73.975,83.05 W3.2
UART: DA6.7
pads on no net: DA2.21 DA2.23 DA6.2 DA6.3 DA6.4 DA6.5 DA6.6 DA6.15 DA6.16 DA6.17 DA6.18 DA6.25 DA6.26 DA6.28 DA6.29 DA6.30 DA6.31 DA6.32 DA6.33 DA6.34 DA6.35 DA6.36 DA6.37
copper on no net:
  other v1: 85.062,85.551 84.382,86.295 84.366,87.253 84.385,88.192 86.925,88.325 84.48,88.833 88.18,88.833 83.991,89.548 88.725,89.525 88.725,90.225 83.991,90.257 89.925,90.525 84.005,91.674 49.6,110.515 50.55,110.515 51.5,110.515 48.825,111.265 66.892,111.984 43.1,112.3 32.025,112.899 54.3,112.95 55.6,112.95 56.9,112.95 75.7,113 75.7,113.8 54.3,114.25 55.6,114.25 56.9,114.25 75.7,114.6 32.025,115.399 75.7,115.4 54.3,115.55 55.6,115.55 56.9,115.55 32.025,116.699 48.825,117.21 49.6,117.96 50.55,117.96 51.5,117.96 40.625,118.399
  other v2: 38.8,77.9 39.8,77.9 37.775,80.65 40.825,80.65 37.775,83.725 40.85,83.725 37.06,84.625 41.575,84.625 37.06,85.575 41.575,85.575 36.11,86.75 42.525,86.75 37.16,87.875 41.475,87.875 38.8,95.975 39.8,95.975 37.775,98.725 40.825,98.725 37.775,101.8 40.85,101.8 37.06,102.7 41.575,102.7 37.06,103.65 41.575,103.65 36.11,104.825 42.525,104.825 37.16,105.95 41.475,105.95

## Silkscreen, mask and mechanical layers (free items; w line width, h text height)
Board:
  lines w0.05: 25,31.413 25,118.12 ; 32.63,127 167.361,127 ; 32.632,25.031 167.367,25.031 ; 175,32.663 175,119.361
  lines w0.25: 24.998,119.368 cw(c32.63,119.368) 32.63,127 ; 25,32.663 ccw(c32.632,32.663) 32.632,25.031 ; 167.367,25.031 ccw(c167.367,32.663) 174.999,32.663 ; 167.368,126.994 cw(c167.368,119.361) 175,119.361